# Altium PCB MachinePCB.PcbDoc
Units mm, origin at the board's own origin, x right, y up, seen from the top; angles counter-clockwise.
Board outline 152.4 x 101.6 mm, 2 copper layers (Top Layer, Bottom Layer); 70 components, 31 nets, 236 pads, 39 vias.
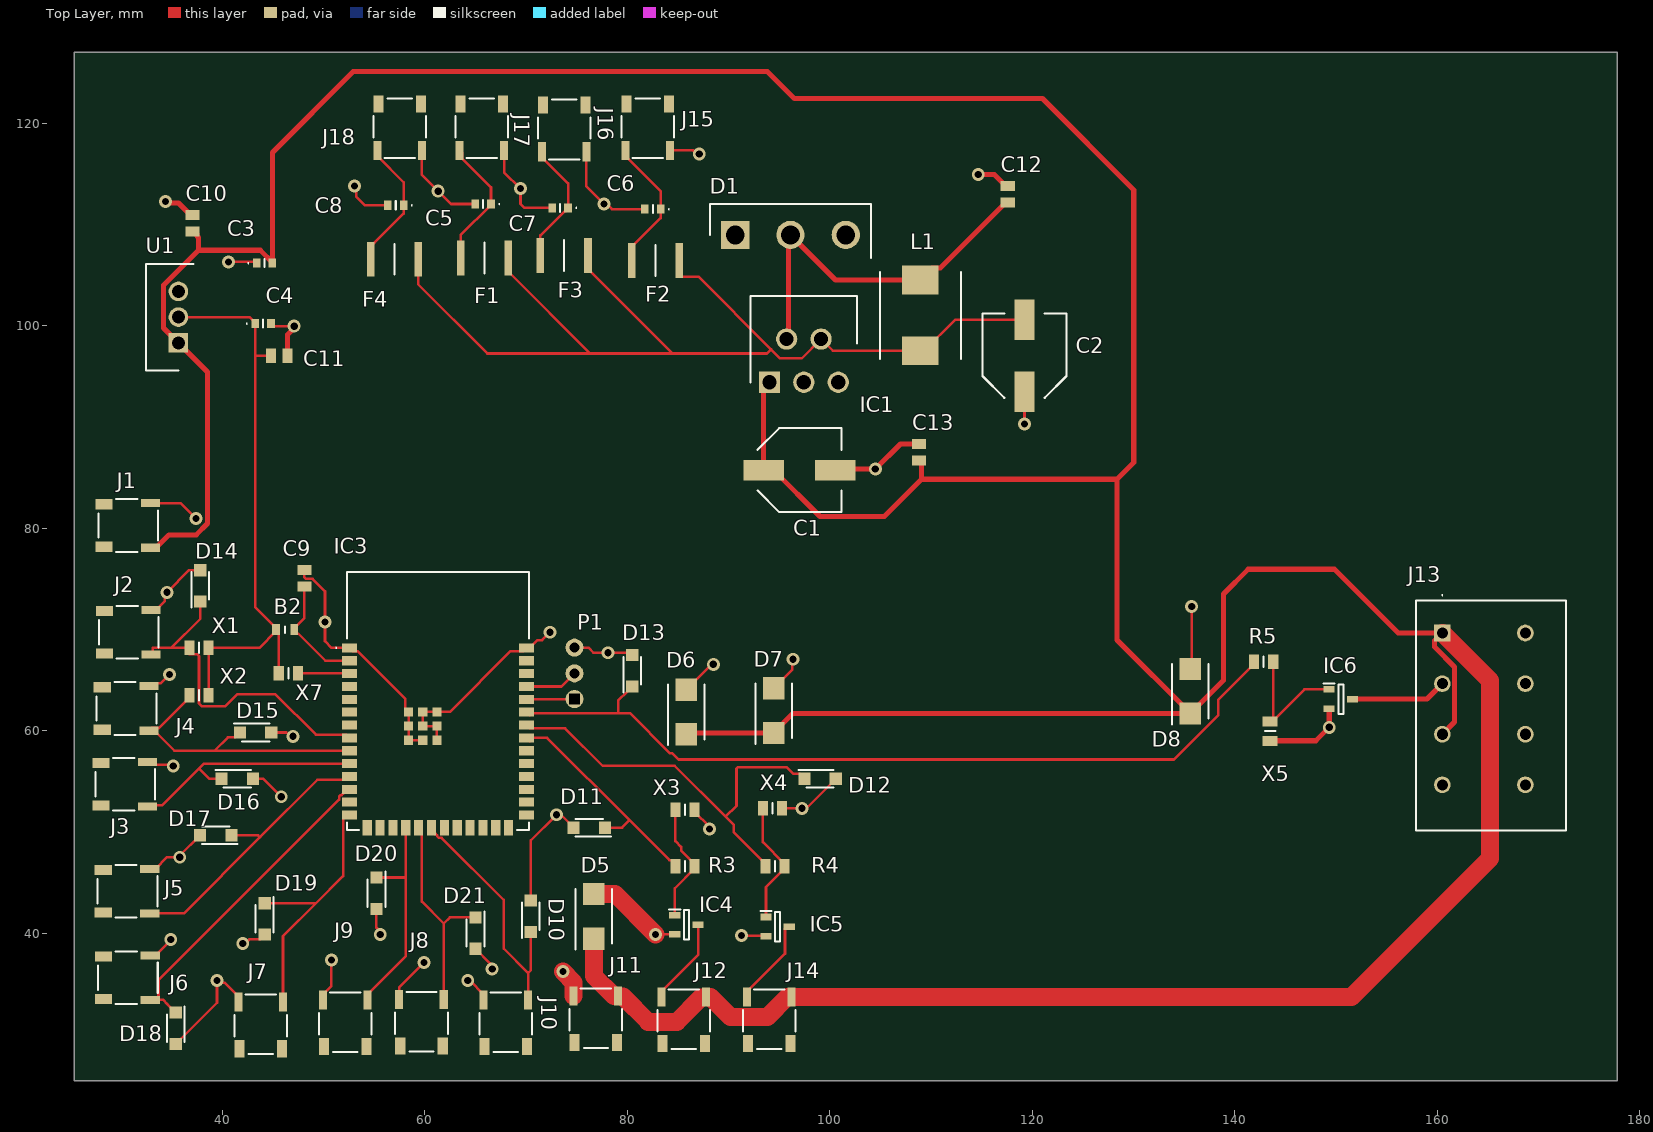
[diagram p0: Top Layer view]
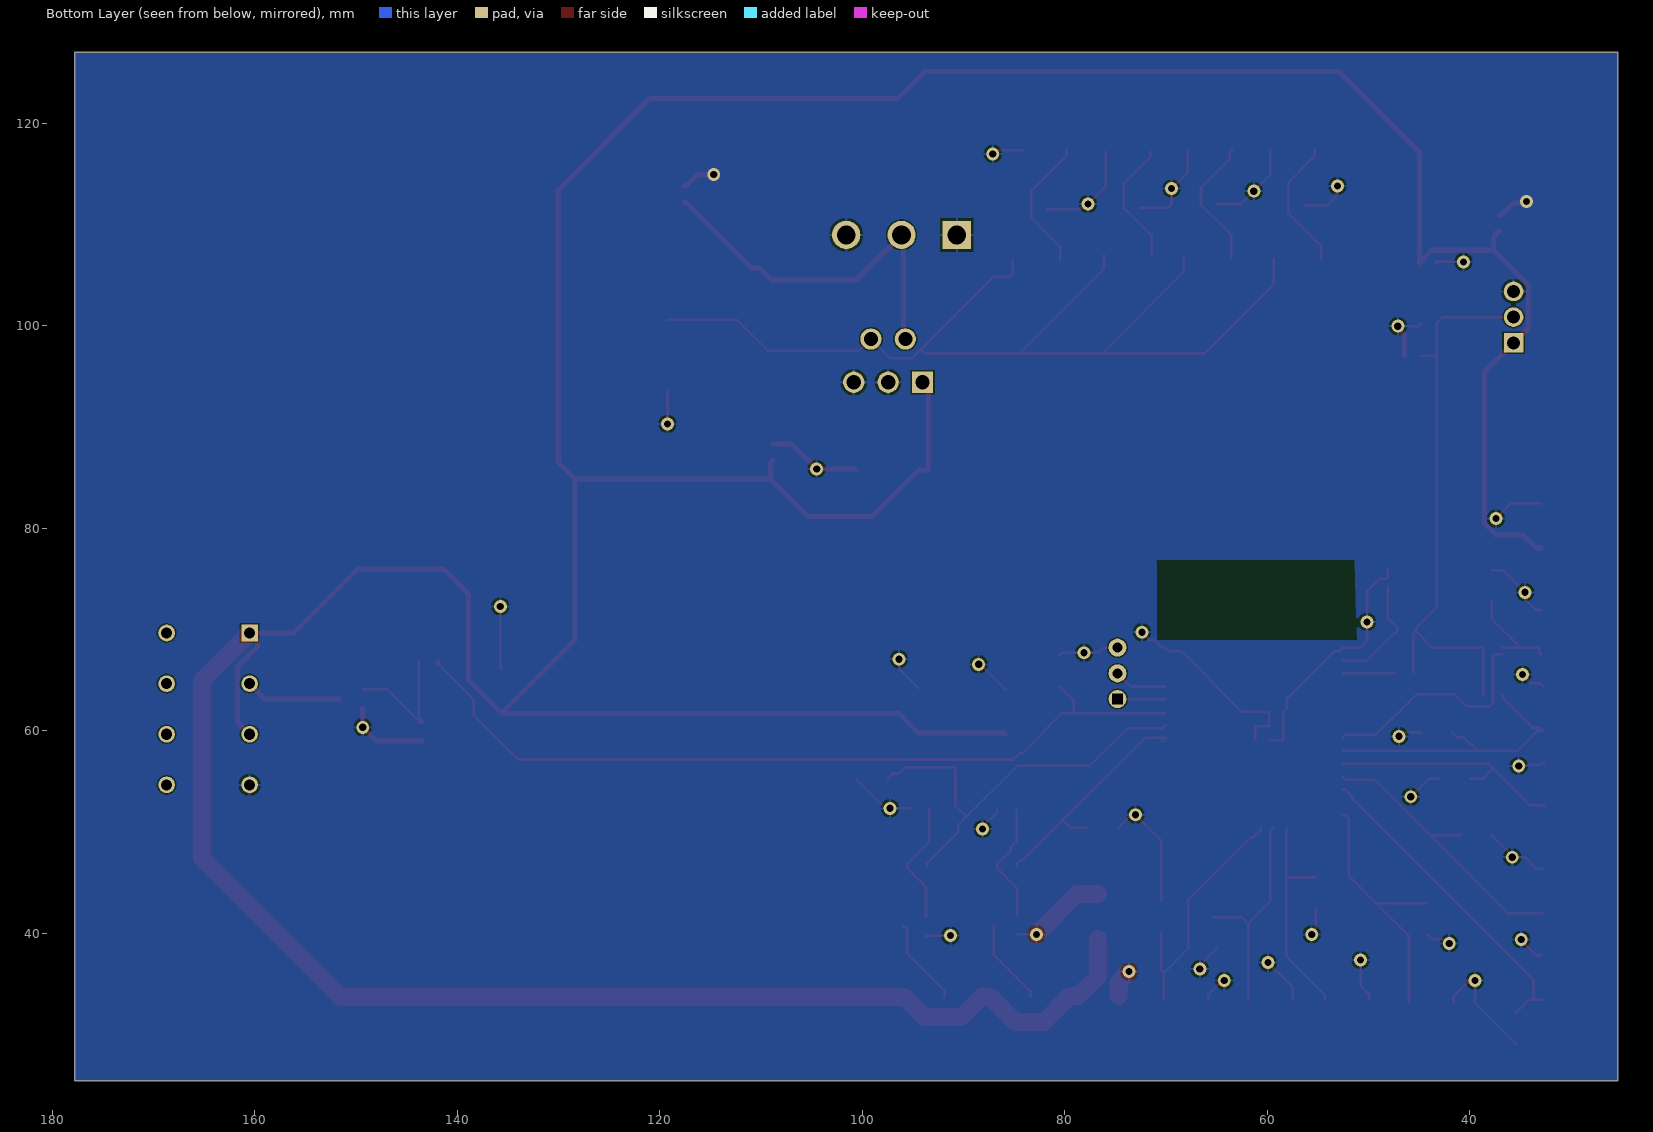
[diagram p1: Bottom Layer view, seen from below]

## Layer stack, top to bottom
Top Solder: solder mask 0.0102, Solder Resist, Dk 3.5
Top Layer: signal copper 0.0356
Dielectric 1: dielectric 0.32, FR-4, Dk 4.8
Bottom Layer: signal copper 0.0356
Bottom Solder: solder mask 0.0102, Solder Resist, Dk 3.5

## Board outline
25.4,25.4 177.8,25.4 177.8,127 25.4,127

## Design rules (kind name [scope] priority, off if disabled: settings)
Clearance [All] p1: gap=0.127 ignorepadtopadclearanceinfootprint=FALSE
PolygonConnect [All] p1: connectstyle=Relief reliefconductorwidth=0.254 reliefentries=4 polygonreliefangle="90 Angle" airgapwidth=0.254
RoutingVias [All] p1: holewidth=0.711 width=1.27 viastyle="Through Hole" minholewidth=0.711 minwidth=1.27 maxholewidth=0.711 maxwidth=1.27
SilkToSolderMaskClearance [IsPad] p1: minsilkscreentomaskgap=0.051 clearancetoexposedcopper=TRUE
SolderMaskExpansion [All] p1: expansion=0.05 istentingtop=FALSE
SupplyNets "Schematic Supply Nets" [InNet('GND')] p1: voltage=0.000
Width [All] p1: maxlimit=2.54 minlimit=0.254 preferedwidth=0.254 bottomlayer_maxwidth=0.254 minimp=50.000000 maximp=50.000000 favimp=50.000000
29 further rules are at their usual default settings.

## Components (designator, comment, footprint, x,y, rotation, side; value= is the part's Value field where it differs from the comment)
B2 "MF-FSML100_8-2" FUSC1608X70N 46.228,69.977 r0 top
C1 "220 uF" EEHZT1E331UP 97.028,85.725 r0 top
C2 "220 uF" EEHZT1E331UP 119.253,97.028 r90 top
C3 "10 uF" ZRB18x 44.196,106.172 r0 top
C4 "10 uF" ZRB18x 44.056,100.203 r0 top
C5 "ZRB18AR61E106KE01L" ZRB18x 65.786,112.014 r180 top
C6 "ZRB18AR61E106KE01L" ZRB18x 82.537,111.506 r180 top
C7 "ZRB18AR61E106KE01L" ZRB18x 73.393,111.633 r180 top
C8 "ZRB18AR61E106KE01L" ZRB18x 57.15,111.887 r180 top
C9 "0.1 uF" CAPC2012X125N 48.133,75.057 r270 top
C10 "0.1 uF" CAPC2012X125N 37.084,110.109 r90 top
C11 "0.1 uF" CAPC2012X125N 45.651,97.028 r180 top
C12 "0.1 uF" CAPC2012X125N 117.602,112.972 r90 top
C13 "0.1 uF" CAPC2012X125N 108.839,87.503 r270 top
D1 "VS-40CPQ045-N3" TO546P531X1558X2499-3P 90.679,108.966 r0 top
D5 "TPSMB12A-VR" DIOM5436X244N 76.708,41.656 r90 top
D6 "TPSMB12A-VR" DIOM5436X244N 85.852,61.849 r90 top
D7 "TPSMB12A-VR" DIOM5436X244N 94.488,61.976 r90 top
D8 "TPSMB12A-VR" DIOM5436X244N 135.636,63.881 r90 top
D10 "SMF5.0A" SODFL3618X110N 70.485,41.656 r90 top
D11 "SMF5.0A" SODFL3618X110N 76.271,50.412 r180 top
D12 "SMF5.0A" SODFL3618X110N 99.06,55.245 r0 top
D13 "SMF5.0A" SODFL3618X110N 80.518,65.913 r90 top
D14 "SMF5.0A" SODFL3618X110N 37.846,74.295 r90 top
D15 "SMF5.0A" SODFL3618X110N 43.307,59.817 r0 top
D16 "SMF5.0A" SODFL3618X110N 41.503,55.245 r0 top
D17 "SMF5.0A" SODFL3618X110N 39.37,49.657 r180 top
D18 "SMF5.0A" SODFL3618X110N 35.433,30.607 r270 top
D19 "SMF5.0A" SODFL3618X110N 44.196,41.402 r270 top
D20 "SMF5.0A" SODFL3618X110N 55.245,43.942 r270 top
D21 "SMF5.0A" SODFL3618X110N 65.024,40.005 r270 top
F1 "PTS18126V300" FUSC4632X120N#1 65.913,106.68 r180 top
F2 "PTS18126V300" FUSC4632X120N#1 82.804,106.426 r180 top
F3 "PTS18126V300" FUSC4632X120N#2 73.787,106.934 r180 top
F4 "PTS18126V300" FUSC4632X120N#1 57.023,106.553 r180 top
IC1 "LM2596T-5.0_LF03" TO170P470X1028X2142-5P 94.058,94.409 r0 top
IC3 "ESP32-S3-WROOM-1-N4" ESP32S3WROOM1N4 61.317,62.662 r0 top
IC4 "NDS355AN" SOT95P251X112-3N 85.859,40.828 r0 top
IC5 "NDS355AN" SOT95P251X112-3N 94.869,40.64 r0 top
IC6 "NDS355AN" SOT95P251X112-3N 150.495,63.119 r0 top
J1 "SM02B-SFHLS-TF_LF__SN_" SM02BSFHLSTFLFSN 30.734,80.264 r180 top
J2 "SM02B-SFHLS-TF_LF__SN_" SM02BSFHLSTFLFSN 30.779,69.723 r180 top
J3 "SM02B-SFHLS-TF_LF__SN_" SM02BSFHLSTFLFSN 30.439,54.696 r180 top
J4 "SM02B-SFHLS-TF_LF__SN_" SM02BSFHLSTFLFSN 30.566,62.189 r180 top
J5 "SM02B-SFHLS-TF_LF__SN_" SM02BSFHLSTFLFSN 30.661,44.148 r180 top
J6 "SM02B-SFHLS-TF_LF__SN_" SM02BSFHLSTFLFSN 30.693,35.601 r180 top
J7 "SM02B-SFHLS-TF_LF__SN_" SM02BSFHLSTFLFSN 43.815,30.988 r270 top
J8 "SM02B-SFHLS-TF_LF__SN_" SM02BSFHLSTFLFSN 59.69,31.242 r270 top
J9 "SM02B-SFHLS-TF_LF__SN_" SM02BSFHLSTFLFSN 52.156,31.201 r270 top
J10 "SM02B-SFHLS-TF_LF__SN_" SM02BSFHLSTFLFSN 68.031,31.201 r270 top
J11 "SM02B-SFHLS-TF_LF__SN_" SM02BSFHLSTFLFSN 76.921,31.582 r270 top
J12 "SM02B-SFHLS-TF_LF__SN_" SM02BSFHLSTFLFSN 85.598,31.496 r270 top
J13 "1330200000" 1330200000 160.528,69.643 r270 top
J14 "SM02B-SFHLS-TF_LF__SN_" SM02BSFHLSTFLFSN 94.048,31.483 r270 top
J15 "SM02B-SFHLS-TF_LF__SN_" SM02BSFHLSTFLFSN 82.042,119.507 r90 top
J16 "SM02B-SFHLS-TF_LF__SN_" SM02BSFHLSTFLFSN 73.787,119.38 r90 top
J17 "SM02B-SFHLS-TF_LF__SN_" SM02BSFHLSTFLFSN 65.659,119.507 r90 top
J18 "SM02B-SFHLS-TF_LF__SN_" SM02BSFHLSTFLFSN 57.531,119.507 r90 top
L1 "33 uH" INDPM8680X400N 108.966,101.021 r270 top
P1 "PREC003SAAN-RC" PCBComponent_1 74.803,65.659 r90 top
R3 "100" RESC2012X55N 85.725,46.609 r0 top
R4 "100" RESC2012X55N 94.615,46.609 r0 top
R5 "100" RESC2012X55N 142.875,66.802 r0 top
U1 "LMS1585ACT-3.3_NOPB" TO254P470X1028X1955-3P 35.687,98.298 r90 top
X1 "4.7k" RESC2012X65N 37.719,68.172 r0 top
X2 "4.7k" RESC2012X65N 37.719,63.5 r0 top
X3 "4.7k" RESC2012X65N 85.725,52.197 r0 top
X4 "4.7k" RESC2012X65N 94.361,52.324 r0 top
X5 "4.7k" RESC2012X65N 143.51,59.944 r270 top
X7 "4.7k" RESC2012X65N 46.543,65.659 r180 top

## Footprints (in the part's own frame and the unit in brackets; to place one, negate y for a bottom-side part, rotate by r counter-clockwise, add the part's x,y. Pads: shape width x height; smd on the part's side, far side on the other; paste and mask are expansions set on the pad)
1330200000 [mm]
  rect 1.65x1.65 hole 1.1: A1(0,0)
  round 1.65 hole 1.1: A2(5,0) A3(10,0) A4(15,0) B1(0,8.2) B2(5,8.2) B3(10,8.2) B4(15,8.2)
  silkscreen extent -3.8,-2.6 19.5,12.2
CAPC2012X125N [mm]
  rect 0.99x1.39 smd: 1(-0.82,0) 2(0.82,0)
DIOM5436X244N [mm]
  rect 2.2x2.15 smd: 1(-2.2,0) 2(2.2,0)
  silkscreen extent -3.27,-1.81 2.7,1.81, body extent -2.7,-1.81 2.7,1.81, height 2.44
EEHZT1E331UP [mm]
  rect 4x2 smd: 1(-3.55,0) 2(3.55,0)
  silkscreen extent -4.15,-4.15 4.15,4.15, body extent -4.79,-4.15 4.91,4.15, height 10.2
ESP32S3WROOM1N4 [mm]
  rect 1.5x0.9 smd: 1(-8.75,5.51) 2(-8.75,4.24) 3(-8.75,2.97) 4(-8.75,1.7) 5(-8.75,0.43) 6(-8.75,-0.84) 7(-8.75,-2.11) 8(-8.75,-3.38) 9(-8.75,-4.65) 10(-8.75,-5.92) 11(-8.75,-7.19) 12(-8.75,-8.46) 13(-8.75,-9.73) 14(-8.75,-11) 27(8.75,-11) 28(8.75,-9.73) 29(8.75,-8.46) 30(8.75,-7.19) 31(8.75,-5.92) 32(8.75,-4.65) 33(8.75,-3.38) 34(8.75,-2.11) 35(8.75,-0.84) 36(8.75,0.43) 37(8.75,1.7) 38(8.75,2.97) 39(8.75,4.24) 40(8.75,5.51)
  rect 0.9x1.5 smd: 15(-6.985,-12.25) 16(-5.715,-12.25) 17(-4.445,-12.25) 18(-3.175,-12.25) 19(-1.905,-12.25) 20(-0.635,-12.25) 21(0.635,-12.25) 22(1.905,-12.25) 23(3.175,-12.25) 24(4.445,-12.25) 25(5.715,-12.25) 26(6.985,-12.25)
  rect 0.9x0.9 smd: 41(-1.5,-2.21) 42(-0.1,-2.21) 43(-0.1,-0.81) 44(-1.5,-0.81) 45(-2.9,-0.81) 46(-2.9,-2.21) 47(-2.9,-3.61) 48(-1.5,-3.61) 49(-0.1,-3.61)
  silkscreen extent -10.1,-12.5 9,13
FUSC1608X70N [mm]
  rect 0.77x1.07 smd: 1(-0.9,0) 2(0.9,0)
  silkscreen extent 0,-0.33 0,0.33
FUSC4632X120N#1 [mm]
  rect 0.75x3.43 smd: 1(-2.35,0) 2(2.35,0)
  silkscreen extent 0,-1.52 0,1.52
FUSC4632X120N#2 [mm]
  rect 0.75x3.43 smd: 1(-2.35,0) " "(2.35,0)
  silkscreen extent 0,-1.52 0,1.52
INDPM8680X400N [mm]
  rect 2.85x3.6 smd: 1(-3.5,0) 2(3.5,0)
  silkscreen extent -4.3,-4 4.3,4
PCBComponent_1 [mm]
  round 1.78 hole 1 square: 1(-2.54,0)
  round 1.78 hole 1: 2(0,0) 3(2.54,0)
RESC2012X55N [mm]
  rect 1x1.45 smd: 1(-0.95,0) 2(0.95,0)
  silkscreen extent 0,-0.53 0,0.53
RESC2012X65N [mm]
  rect 1x1.45 smd: 1(-0.95,0) 2(0.95,0)
  silkscreen extent 0,-0.53 0,0.53
SM02BSFHLSTFLFSN [mm]
  rect 1.7x1 smd: 1(2.4,2.1) 2(2.4,-2.1)
  rect 1.9x0.8 smd: MP1(-2.2,2.2) MP2(-2.2,-2.2)
  silkscreen extent -2.95,-2.6 2.95,2.6
SODFL3618X110N [mm]
  rect 1.2x1.22 smd: 1(-1.55,0) 2(1.55,0)
  silkscreen extent -2.15,-0.87 1.35,0.87
SOT95P251X112-3N [mm]
  rect 1.1x0.65 smd: 1(-1.15,0.95) 2(-1.15,-0.95) 3(1.15,0)
  silkscreen extent -1.7,-1.46 0.25,1.53
TO170P470X1028X2142-5P [mm]
  rect 2.1x2.1 / inner round 2.1 / far side rect 2.1x2.1 hole 1.4: 1(0,0)
  round 2.1 hole 1.4: 2(1.7,4.27) 3(3.4,0) 4(5.1,4.27) 5(6.8,0)
  silkscreen extent -1.87,0 8.67,8.53
TO254P470X1028X1955-3P [mm]
  rect 1.935x1.935 / inner round 1.935 / far side rect 1.935x1.935 hole 1.29: 1(0,0)
  round 1.935 hole 1.29: 2(2.54,0) 3(5.08,0)
  silkscreen extent -2.73,-1.5 7.81,3.2
TO546P531X1558X2499-3P [mm]
  rect 2.79x2.79 / inner round 2.79 / far side rect 2.79x2.79 hole 1.86: 1(0,0)
  round 2.79 hole 1.86: 2(5.46,0) 3(10.92,0)
  silkscreen extent -2.47,-2.27 13.39,3.04
ZRB18x [mm]
  rect 0.75x0.9 smd: 1(-0.775,0) 2(0.775,0)
  silkscreen extent -1.65,-0.4 0,0.4

## Part data
B2: "Resettable Fuses - PPTC 8V     1A", Manufacturer_Name=Bourns, Manufacturer_Part_Number=MF-FSML100/8-2, Mouser Part Number=652-MF-FSML100/8-2, Datasheet Link=https://www.mouser.in/datasheet/2/54/bourns_05032019_MF-FSML-X_datasheet-1591429.pdf, Geometry.Height=0.7mm, Mouser Price/Stock=https://www.mouser.co.uk/ProductDetail/Bourns/MF-FSML100-8-2?qs=EBDBlbfErPzIwKpEUXHByQ%3D%3D
C1 C2: library part EEE-TP1C221AP, "Capacitor Polarised", Manufacturer_Name=Panasonic, Mouser Part Number=667-EEE-TP1C221AP, Datasheet Link=http://industrial.panasonic.com/cdbs/www-data/pdf/RDE0000/ABA0000C1196.pdf, Height=10.8mm, Manufacturer_Part_Number=EEE-TP1C221AP, Mouser Price/Stock=https://www.mouser.com/Search/Refine.aspx?Keyword=667-EEE-TP1C221AP
C3 C4: library part ZRB18AR61E106KE01L, Manufacturer_Name="Murata Electronics", Datasheet Link=https://search.murata.co.jp/Ceramy/image/img/A01X/G101/ENG/ZRB18AR61E106KE01-02A.pdf, Height=1.2mm, Manufacturer_Part_Number=ZRB18AR61E106KE01L
C5 C6 C7 C8: "Capacitor", Manufacturer_Name="Murata Electronics", Datasheet Link=https://search.murata.co.jp/Ceramy/image/img/A01X/G101/ENG/ZRB18AR61E106KE01-02A.pdf, Height=1.2mm, Manufacturer_Part_Number=ZRB18AR61E106KE01L
C9 C10 C11 C12 C13: library part 885382207007, "WCAP-CSST Soft Termination MLCC X7R0805104K050DFCT1S000; SMT Chip; 100 nF +/- 10%; 50 V(DC); -55C / +125C; size 0805; LxWxH 2.0 x 1.25 x 1.25; Term. Ag-Polymer/Ni/Sn", Manufacturer_Name="Wurth Elektronik", Mouser Part Number=710-885382207007, Datasheet Link=https://www.we-online.com/catalog/datasheet/885382207007.pdf, Geometry.Height=1.25mm, Manufacturer_Part_Number=885382207007, Mouser Price/Stock=https://www.mouser.co.uk/ProductDetail/Wurth-Elektronik/885382207007?qs=0lSvoLzn4L%2FSz5irZYcG7Q%3D%3D
D1: "Diode", Manufacturer_Name=Vishay, Mouser Part Number=78-VS-40CPQ045-N3, Datasheet Link=https://www.vishay.com/docs/96456/vs-40cpq-n3series.pdf, Height=5.31mm, Manufacturer_Part_Number=VS-40CPQ045-N3, Mouser Price/Stock=https://www.mouser.com/Search/Refine.aspx?Keyword=78-VS-40CPQ045-N3
D5 D6 D7 D8: "TVS Diode (Uni-directional)", Manufacturer_Name=LITTELFUSE, Mouser Part Number=576-TPSMB12A-VR, Arrow Part Number=TPSMB12A-VR, Arrow Price/Stock=https://www.arrow.com/en/products/tpsmb12a-vr/littelfuse?region=europe, Datasheet Link=http://www.littelfuse.com/~/media/electronics/datasheets/tvs_diodes/littelfuse_tvs_diode_tpsmb_vr_datasheet.pdf.pdf, Height=2.44mm, Manufacturer_Part_Number=TPSMB12A-VR, Mouser Price/Stock=https://www.mouser.co.uk/ProductDetail/Littelfuse/TPSMB12A-VR?qs=AQlKX63v8RvODBvNBGUrbg%3D%3D
D10 D11 D12 D13 D14 D15 D16 D17 D18 D19 D20 D21: "LITTELFUSE - SMF5.0A - TVS DIODE, 200W, 5V, UNIDIR, SOD-123FL", Manufacturer_Name=LITTELFUSE, Mouser Part Number=576-SMF5.0A, Datasheet Link=https://componentsearchengine.com/Datasheets/2/SMF5.0A.pdf, Geometry.Height=1.1mm, Manufacturer_Part_Number=SMF5.0A, Mouser Price/Stock=https://www.mouser.co.uk/ProductDetail/Littelfuse/SMF5.0A?qs=w7s0xA%252BTU%2FHYt6%2FEHP8V9g%3D%3D
F1 F2 F3 F4: "PPTC SMD 1812 6V 3.0A", Manufacturer_Name=Eaton, Mouser Part Number=504-PTS18126V300, Datasheet Link=https://www.eaton.com/content/dam/eaton/products/electronic-components/resources/data-sheet/eaton-pts1812-6-60-volt-dc-surface-mount-resettable-ptc-data-sheet.pdf, Geometry.Height=1.2mm, Manufacturer_Part_Number=PTS18126V300, Mouser Price/Stock=https://www.mouser.co.uk/ProductDetail/Eaton-Electronics/PTS18126V300?qs=QmibqUXyDhQSUADtV47rkw%3D%3D
IC1: "Integrated Circuit", Arrow Part Number=LM2596T-5.0/LF03, Manufacturer_Name="Texas Instruments", Mouser Part Number=926-LM2596T-50/LF03, Arrow Price/Stock=https://www.arrow.com/en/products/lm2596t-5.0lf03/texas-instruments?utm_currency=USD&region=nac, Datasheet Link=https://www.ti.com/lit/ds/symlink/lm2596.pdf?ts=1607069798907&ref_url=https%253A%252F%252Fwww.ti.com%252Fstore%252Fti%252Fen%252Fp%252Fproduct%252F%253Fp%253DLM2596T-5.0%252FLF03%2526keyMatch%253DLM2596T-5.0%252FLF03%2526tisearch%253DSearch-EN-everything%, Height=4.7mm, Manufacturer_Part_Number=LM2596T-5.0/LF03, Mouser Price/Stock=https://www.mouser.co.uk/ProductDetail/Texas-Instruments/LM2596T-5.0-LF03?qs=X1J7HmVL2ZG6KM98hB9zGA%3D%3D
IC3: "Integrated Circuit", Manufacturer_Name="Espressif Systems", Mouser Part Number=356-ESP32-S3WROOM1N4, Datasheet Link=https://www.espressif.com/sites/default/files/documentation/esp32-s3-wroom-1_wroom-1u_datasheet_en.pdf, Height=3.25mm, Manufacturer_Part_Number=ESP32-S3-WROOM-1-N4, Mouser Price/Stock=https://www.mouser.co.uk/ProductDetail/Espressif-Systems/ESP32-S3-WROOM-1-N4?qs=Li%252BoUPsLEnsO%2FkiJOUK0FQ%3D%3D
IC4 IC5 IC6: "Integrated Circuit", Manufacturer_Name=onsemi, Mouser Part Number=512-NDS355AN, Arrow Part Number=NDS355AN, Arrow Price/Stock=https://www.arrow.com/en/products/nds355an/on-semiconductor?utm_currency=USD&region=europe, Datasheet Link=https://www.onsemi.com/pub/Collateral/NDS355AN-D.PDF, Height=1.12mm, Manufacturer_Part_Number=NDS355AN, Mouser Price/Stock=https://www.mouser.co.uk/ProductDetail/onsemi-Fairchild/NDS355AN?qs=FOlmdCx%252BAA0yQlAVFAsL8w%3D%3D
J1 J2 J3 J4 J5 J6 J7 J8 J9 J10 J11 J12 J14 J15 J16 J17 J18: "CONN HEADER SMD R/A 2POS 1.8MM", Manufacturer_Name="JST (JAPAN SOLDERLESS TERMINALS)", Manufacturer_Part_Number=SM02B-SFHLS-TF(LF)(SN), Mouser Part Number=306-SM02BSFHLSTFLFSN, Geometry.Height=3mm, Mouser Price/Stock=https://www.mouser.co.uk/ProductDetail/JST-Commercial/SM02B-SFHLS-TFLFSN?qs=QpmGXVUTftEFVlI2shSw8Q%3D%3D
J13: "Connector", Manufacturer_Name=Weidmuller, Mouser Part Number=470-1330200000, Datasheet Link=https://datasheet.weidmueller.com/pdf/en/1330200000/scope/2/, Height=19.2mm, Manufacturer_Part_Number=1330200000, Mouser Price/Stock=https://www.mouser.co.uk/ProductDetail/Weidmuller/1330200000?qs=WJDKaGZ8K%252B5Dx5GLcU%2Fbhw%3D%3D
L1: library part F1F2-0804-330M, "Inductor", Manufacturer_Name=Bel, Datasheet Link=https://www.mouser.in/datasheet/3/191/1/ds-ST-F1F2-0804-series.pdf, Height=4mm, Manufacturer_Part_Number=F1F2-0804-330M
P1: "ESP32 USB Connector"
R3 R4 R5: library part TNPW0805100RBEEA, "Resistor", Manufacturer_Name=Vishay, Mouser Part Number=71-TNPW0805100RBEEA, Arrow Part Number=TNPW0805100RBEEA, Arrow Price/Stock=https://www.arrow.com/en/products/tnpw0805100rbeea/vishay?region=nac, Datasheet Link=http://www.vishay.com/docs/31006/tnpw.pdf, Height=0.55mm, Manufacturer_Part_Number=TNPW0805100RBEEA, Mouser Price/Stock=https://www.mouser.co.uk/ProductDetail/Vishay-Dale/TNPW0805100RBEEA?qs=CqEPuS5aiX%2FTdzUNace1OQ%3D%3D
U1: "Undefined or Miscellaneous", Arrow Part Number=LMS1585ACT-3.3/NOPB, Manufacturer_Name="Texas Instruments", Mouser Part Number=926-LMS1585ACT33NOPB, Arrow Price/Stock=https://www.arrow.com/en/products/lms1585act-3.3nopb/texas-instruments?region=nac, Datasheet Link=http://www.ti.com/lit/gpn/lms1585a, Height=4.7mm, Manufacturer_Part_Number=LMS1585ACT-3.3/NOPB, Mouser Price/Stock=https://www.mouser.co.uk/ProductDetail/Texas-Instruments/LMS1585ACT-3.3-NOPB?qs=7lkVKPoqpbYfezQINhjreg%3D%3D
X1 X2 X3 X4 X5 X7: library part CPF0805B4K7E1, Manufacturer_Name="TE Connectivity", Mouser Part Number=279-CPF0805B4K7E1, Datasheet Link=https://www.te.com/commerce/DocumentDelivery/DDEController?Action=srchrtrv&DocNm=8-1773459-4_ELEVATOR_ESCALATOR_SOLUTIONS&DocType=Data%20Sheet&DocLang=English&PartCntxt=7-1614884-6&DocFormat=pdf, Geometry.Height=0.65mm, Manufacturer_Part_Number=CPF0805B4K7E1, Mouser Price/Stock=https://www.mouser.co.uk/ProductDetail/TE-Connectivity-Holsworthy/CPF0805B4K7E1?qs=8G8kQhBkhGiesIpPd19ZrQ%3D%3D

## Via types
v1: diameter 1.27, hole 0.711, Top Layer to Bottom Layer, 39 vias

## Nets (pads, with @x,y where several pads share a name; then routed paths per layer and width w, separated by ;. In a path a pad name is that pad's centre, name@x,y a point inside that pad or via, vN(x,y) a via of type N, cw(c..) or ccw(c..) an arc to the next point about the centre after c; other vN are vias at no path point)
12_IN: C1.1 C3.2 C10.1 C13.2 D5.1 D6.1 D7.1 D8.1 IC1.1 J1.MP1 J11.MP1 J12.MP1 J13.A1 J13.A3 J14.MP1 U1.1 | length 481.9
  Top Layer w0.508: J1.MP1 33.484,78.064 34.758,79.338 37.441,79.338 38.568,80.465 38.568,95.417 U1.1 34.211,99.774 34.211,103.989 37.664,107.442 ; C10.1 37.284,109.289 37.525,109.048 37.525,108.848 37.664,108.709 37.664,107.442 ; D6.1 85.979,59.776 D7.1 ; IC1.1 93.478,93.829 C1.1 94.478,85.725 99.05,81.153 105.41,81.153 109.093,84.836 ; D7.1@94.488,59.801 96.368,61.681 D8.1 D8.1@135.636,61.706 ; C13.2 108.852,86.683 109.093,86.442 109.093,84.836 ; J13.A3 161.734,60.849 161.734,66.29 159.766,68.258 159.766,68.881 J13.A1 156.163,69.643 149.86,75.946 141.351,75.946 138.904,73.499 138.904,64.974 D8.1@135.636,61.706 ; 37.664,107.442 43.776,107.442 44.971,106.247 C3.2 44.971,117.107 52.959,125.095 93.853,125.095 96.52,122.428 121.031,122.428 130.048,113.411 130.048,86.487 128.397,84.836 ; 109.093,84.836 128.397,84.836 ; 128.397,84.836 128.397,68.945 D8.1@135.636,61.706
  Top Layer w1.778: D5.1@76.708,39.431 76.708,35.767 78.693,33.782 J11.MP1 ; 79.61,33.721 82.089,31.242 84.916,31.242 87.309,33.635 ; J12.MP1 88.226,33.696 90.205,31.717 93.854,31.717 95.82,33.683 J14.MP1 151.539,33.683 165.227,47.371 165.227,64.944 J13.A1
+3.3V: B2.1 C4.1 C11.2 U1.2 X1.2 X2.2 X7.2 | length 56.8
  Top Layer w0.254: U1.2 42.721,100.838 43.281,100.278 C4.1 43.281,97.028 ; X2.2 X1.2 43.673,68.172 45.328,69.827 45.593,69.562 X7.2 ; C11.2 43.281,97.028 ; B2.1 45.328,70.127 43.281,72.174 43.281,97.028
+5V: C2.2 F1.1 F2.1 F3.1 F4.1 IC1.4 L1.2 | length 107.7
  Top Layer w0.254: F4.1 59.373,104.076 66.201,97.248 76.355,97.248 ; F1.1 68.263,105.34 76.355,97.248 ; F3.1 76.137,105.594 84.483,97.248 ; F2.1 85.154,105.086 85.402,104.838 87.059,104.838 94.234,97.663 ; C2.2 112.398,100.578 109.341,97.521 L1.2 100.316,97.521 IC1.4 97.253,96.774 95.123,96.774 94.234,97.663 ; 76.355,97.248 84.483,97.248 ; 84.483,97.248 93.819,97.248 94.234,97.663
FLOW: D15.1 IC3.9 J4.MP1 X2.1 | length 29.1
  Top Layer w0.254: J4.MP1 33.316,59.989 35.293,58.012 39.243,58.012 ; J4.MP1@33.039,60.262 33.756,60.262 36.769,63.275 X2.1 ; D15.1 41.757,59.807 41.284,59.334 40.565,59.334 39.243,58.012 ; IC3.9 39.243,58.012
GND: C1.2 C2.1 C3.1 C4.2 C5.2 C6.2 C7.2 C8.2 C9.1 C10.2 C11.1 C12.2 C13.1 D1.1 D1.3 D5.2 D6.2 D7.2 D8.2 D10.2 D11.2 D12.2 D13.2 D14.2 D15.2 D16.2 D17.2 D18.2 D19.2 D20.2 D21.2 IC1.3 IC1.5 IC3.1 IC3.40 IC3.41 IC3.42 IC3.43 IC3.44 IC3.45 IC3.46 IC3.47 IC3.48 IC3.49 IC4.2 IC5.2 IC6.2 J1.MP2 J2.MP2 J3.MP2 J4.MP2 J5.MP2 J6.MP2 J7.MP2 J8.MP2 J9.MP2 J10.MP2 J11.MP2 J13.A4 J15.MP2 J16.MP2 J17.MP2 J18.MP2 P1.3 U1.3 X3.2 X4.2 X5.2 | length 234.2
  Top Layer w0.254: J3.MP2 32.912,56.623 35.071,56.623 v1(35.179,56.515) ; J4.MP2 33.039,64.662 33.928,64.662 v1(34.798,65.532) ; J5.MP2 33.411,46.348 34.561,47.498 v1(35.814,47.498) 35.814,47.641 37.82,49.647 D17.2 ; J6.MP2 33.443,37.801 34.925,39.283 v1(34.925,39.37) ; J2.MP2@32.934,71.923 33.484,71.923 34.35,72.789 34.35,73.466 v1(34.544,73.66) 36.729,75.845 D14.2 ; J1.MP2 35.9,82.464 v1(37.425,80.939) ; D18.2 35.443,29.057 35.916,29.53 35.916,29.54 39.497,33.121 v1(39.497,35.306) 39.691,35.112 40.241,35.112 41.615,33.738 J7.MP2 ; v1(40.64,106.299) 43.294,106.299 C3.1 ; v1(42.037,38.989) 42.312,38.989 42.702,39.379 43.723,39.379 D19.2 ; D16.2 44.069,55.245 v1(45.847,53.467) ; C4.2 44.831,100.197 45.079,99.949 v1(47.117,99.949) ; D15.2 46.334,59.817 46.715,59.436 v1(46.99,59.436) ; C9.1 48.133,75.135 48.282,74.986 48.933,74.986 50.165,73.754 v1(50.165,70.739) 50.165,68.834 50.827,68.172 IC3.1 52.89,67.849 53.359,67.849 58.094,63.114 58.094,62.175 IC3.45 IC3.46 IC3.47 IC3.48 ; J9.MP2 49.956,33.951 50.8,34.795 v1(50.8,37.338) ; v1(53.086,113.792) 53.234,113.644 53.234,112.776 54.123,111.887 C8.2 ; D20.2 55.245,40.534 55.626,40.153 v1(55.626,39.878) ; J8.MP2 57.49,34.63 v1(59.944,37.084) ; J18.MP2 59.731,114.894 v1(61.341,113.284) 62.611,112.014 C5.2 ; IC3.49 IC3.42 IC3.41 IC3.44 IC3.43 62.494,61.852 68.491,67.849 69.744,67.849 IC3.40 70.367,68.172 71.138,68.943 71.61,68.943 v1(72.39,69.723) ; v1(64.262,35.306) 64.476,35.306 65.831,33.951 J10.MP2 ; D21.2 65.034,38.455 66.481,37.008 66.481,36.643 v1(66.675,36.449) ; J17.MP2 67.859,115.148 v1(69.469,113.538) 69.469,112.035 69.871,111.633 C7.2 ; D10.2 70.485,49.149 v1(73.025,51.689) 73.219,51.495 73.648,51.495 74.721,50.422 D11.2 ; P1.3 76.172,68.199 76.68,67.691 v1(78.105,67.691) 80.29,67.691 D13.2 ; J16.MP2 75.987,113.751 v1(77.724,112.014) 77.999,112.014 78.507,111.506 C6.2 ; v1(82.804,39.878) IC4.2 ; J15.MP2 86.507,117.307 86.847,116.967 v1(87.122,116.967) ; D6.2 85.852,64.074 88.326,66.548 v1(88.519,66.548) ; X3.2 86.675,51.972 88.138,50.509 v1(88.138,50.292) ; v1(91.313,39.751) 91.344,39.72 93.688,39.72 IC5.2 ; D7.2 94.488,64.201 96.327,66.04 96.327,66.99 v1(96.393,67.056) ; X4.2 v1(97.282,52.324) 97.476,52.518 97.893,52.518 100.61,55.235 D12.2 ; C1.2 C1.2@100.705,85.852 ; v1(119.253,90.297) C2.1 ; D8.2 135.763,66.208 v1(135.763,72.263) ; IC6.2 IC6.2@149.352,62.162
  Top Layer w0.508: v1(34.417,112.268) 34.563,112.122 35.691,112.122 36.884,110.929 C10.2 ; C11.1 46.471,99.097 47.117,99.743 v1(47.117,99.949) ; C1.2@100.705,85.852 v1(104.521,85.852) 106.992,88.323 C13.1 ; v1(114.681,114.935) 116.259,114.935 117.402,113.792 C12.2 ; X5.2 148.021,58.994 v1(149.352,60.325) IC6.2@149.352,62.162
  Top Layer w1.778: v1(73.66,36.195) 74.721,35.134 J11.MP2 ; D5.2 78.826,43.856 v1(82.804,39.878)
HX711_ADC: D16.1 IC3.10 J3.MP1 | length 24.3
  Top Layer w0.254: J3.MP1 32.76,52.617 34.075,52.617 37.719,56.261 ; D16.1 38.735,55.245 37.719,56.261 ; IC3.10 38.2,56.742 37.719,56.261
HX711_ADC2: D20.1 IC3.18 J9.MP1 | length 21.5
  Top Layer w0.254: J9.MP1 54.356,33.951 58.142,37.737 58.142,45.466 ; D20.1 58.116,45.492 58.142,45.466 ; IC3.18 58.142,45.466
HX711_CLK1: D19.1 IC3.14 J7.MP1 | length 26.4
  Top Layer w0.254: D19.1 49.25,42.952 49.253,42.949 ; J7.MP1 46.015,39.71 49.253,42.949 ; IC3.14 52.267,51.662 51.944,51.339 51.944,45.639 49.253,42.949
HX711_CLK2: D21.1 IC3.19 J8.MP1 | length 21.6
  Top Layer w0.254: IC3.19 59.735,50.089 59.735,43.104 61.89,40.949 ; J8.MP1 61.89,40.949 ; D21.1@65.287,41.555 62.496,41.555 61.89,40.949
MOTOR_DIR: D10.1 IC3.20 J10.MP1 | length 25.3
  Top Layer w0.254: IC3.20 60.682,50.112 61.005,49.789 61.099,49.789 61.248,49.64 61.248,49.557 61.397,49.408 61.686,49.408 67.818,43.276 67.818,38.481 70.231,36.068 ; J10.MP1 70.231,36.068 ; D10.1 70.485,36.322 70.231,36.068
MOTOR_PWM: D17.1 IC3.11 J5.MP1 | length 28.2
  Top Layer w0.254: J5.MP1 36.214,41.948 43.742,49.476 ; D17.1 43.561,49.657 43.742,49.476 ; IC3.11 52.244,55.149 49.415,55.149 43.742,49.476
NetB2_2: B2.2 C9.2 IC3.2 | length 11.5
  Top Layer w0.254: C9.2 48.133,71.132 47.128,70.127 47.128,69.827 47.386,69.569 47.536,69.569 50.203,66.902 IC3.2
NetC5_1: C5.1 F1.2 J17.MP1 | length 13.2
  Top Layer w0.254: J17.MP1 63.732,117.034 63.732,116.481 66.561,113.652 C5.1 66.561,111.939 63.563,108.941 F1.2
NetC6_1: C6.1 F2.2 J15.MP1 | length 13.5
  Top Layer w0.254: J15.MP1 79.842,116.757 83.312,113.287 C6.1 83.312,110.624 80.454,107.766 F2.2
NetC7_1: "F3. " C7.1 J16.MP1 | length 12.5
  Top Layer w0.254: 71.437,106.934 71.437,108.902 73.845,111.31 73.92,111.31 74.168,111.558 C7.1 74.168,114.049 71.587,116.63 J16.MP1
NetC8_1: C8.1 F4.2 J18.MP1 | length 13.2
  Top Layer w0.254: F4.2 54.673,107.893 54.921,108.141 55.01,108.141 57.925,111.056 C8.1 57.925,114.163 55.331,116.757 J18.MP1
NetC12_1: C12.1 D1.2 IC1.2 L1.1 | length 36.9
  Top Layer w0.508: IC1.2 95.948,98.87 95.948,108.775 D1.2 100.584,104.521 L1.1 110.137,105.692 110.942,105.692 117.402,112.152 C12.1
NetIC3_3: IC3.3 X7.1 | length 5.1
  Top Layer w0.254: X7.1 52.54,65.659 IC3.3
NetIC3_36: IC3.36 P1.1 | length 4.7
  Top Layer w0.254: IC3.36 70.094,63.119 P1.1
NetIC3_37: IC3.37 P1.2 | length 5.3
  Top Layer w0.254: IC3.37 73.506,64.362 P1.2
NetIC4_1: IC4.1 R3.2 X3.1 | length 12
  Top Layer w0.254: IC4.1 84.709,44.418 86.675,46.384 R3.2 86.675,46.834 85.344,48.165 85.344,48.514 84.775,49.083 X3.1
NetIC4_3: IC4.3 J12.MP2 | length 8.6
  Top Layer w0.254: J12.MP2 83.398,34.246 87.009,37.857 IC4.3
NetIC5_1: IC5.1 R4.2 X4.1 | length 12.4
  Top Layer w0.254: X4.1 93.411,48.988 95.565,46.834 R4.2 95.565,46.384 93.719,44.538 IC5.1
NetIC5_3: IC5.3 J14.MP2 | length 8.8
  Top Layer w0.254: J14.MP2 91.848,34.233 95.596,37.981 95.596,40.442 95.794,40.64 IC5.3
NetIC6_1: IC6.1 R5.2 X5.1 | length 13.2
  Top Layer w0.254: X5.1@143.735,60.894 146.91,64.069 IC6.1 ; X5.1@143.825,61.14 R5.2
  Top Layer w0.508: X5.1 X5.1@143.735,60.894 ; X5.1@143.579,60.894 X5.1@143.825,61.14
NetIC6_3: IC6.3 J13.A2 | length 9.5
  Top Layer w0.508: IC6.3 159.004,63.119 J13.A2
PUMP_1: D11.1 IC3.33 R3.1 | length 23.3
  Top Layer w0.254: IC3.33@70.39,58.959 IC3.33 72.102,59.282 80.233,51.15 ; D11.1 79.495,50.412 80.233,51.15 ; R3.1 84.775,46.834 84.402,47.207 84.177,47.207 80.233,51.15
PUMP_2: D12.1 IC3.34 R4.1 | length 42.4
  Top Layer w0.254: IC3.34 70.39,60.229 73.883,60.229 77.597,56.515 84.709,56.515 89.725,51.498 ; R4.1 93.665,46.834 90.551,49.948 90.551,50.673 89.725,51.498 ; D12.1 97.51,55.255 97.037,55.728 96.418,55.728 95.758,56.388 90.954,56.388 90.805,56.239 90.805,52.578 89.725,51.498
SOL: D13.1 IC3.35 R5.1 | length 82.3
  Top Layer w0.254: IC3.35 IC3.35@70.168,61.721 ; IC3.35@70.39,61.499 IC3.35@70.168,61.721 ; D13.1 80.508,64.363 80.035,63.89 80.035,63.88 79.121,62.966 79.121,61.721 ; R5.1@141.925,66.577 138.41,63.062 138.41,61.562 133.998,57.15 85.09,57.15 84.455,57.785 84.201,57.785 80.265,61.721 79.121,61.721 ; IC3.35@70.168,61.721 79.121,61.721
  Top Layer w0.508: R5.1@141.925,66.577 R5.1
SSR: D18.1 IC3.12 J6.MP1 | length 32.6
  Top Layer w0.254: D18.1 35.423,32.157 34.569,33.011 34.569,33.021 34.189,33.401 J6.MP1 33.443,33.401 33.716,33.674 33.716,35.351 51.563,53.198 51.563,53.487 51.712,53.636 51.795,53.636 51.944,53.785 51.944,53.879 52.267,54.202 IC3.12
WATER_TEMP: D14.1 IC3.8 J2.MP1 X1.1 | length 33
  Top Layer w0.254: J2.MP1 33.169,67.713 33.169,68.172 34.969,68.172 ; X1.1@36.769,67.523 37.554,67.523 37.719,67.358 37.719,62.686 38.011,62.394 40.295,62.394 41.489,63.588 45.269,63.588 49.252,59.605 52.244,59.605 IC3.8 ; X1.1 34.969,68.172 ; D14.1 37.846,71.049 34.969,68.172
pads on no net: IC3.4 IC3.5 IC3.6 IC3.7 IC3.13 IC3.15 IC3.16 IC3.17 IC3.21 IC3.22 IC3.23 IC3.24 IC3.25 IC3.26 IC3.27 IC3.28 IC3.29 IC3.30 IC3.31 IC3.32 IC3.38 IC3.39 J1.1 J1.2 J2.1 J2.2 J3.1 J3.2 J4.1 J4.2 J5.1 J5.2 J6.1 J6.2 J7.1 J7.2 J8.1 J8.2 J9.1 J9.2 J10.1 J10.2 J11.1 J11.2 J12.1 J12.2 J13.B1 J13.B2 J13.B3 J13.B4 J14.1 J14.2 J15.1 J15.2 J16.1 J16.2 J17.1 J17.2 J18.1 J18.2

## Polygon pours and split planes (outlines as drawn)
GND on Bottom Layer "3" (solid, pour order 0): 25.445,127 177.845,127 177.845,25.4 25.445,25.4

## Other copper
Bottom Layer:
  pour cut-out: 51.435,76.835 70.993,76.835 70.866,76.708 70.866,68.961 51.181,68.961